# EAGLE board main_schematic (EAGLE 8.7.0)

Size 252.71 x 134.29 mm. Coordinates in mm from the lower left corner, seen from the top.
Outline: 0,0 252.71,0 252.71,134.29 0,134.29 0,0
Copper layers (1*16): Top 0.035mm / dielectric 1.5mm / Bottom 0.035mm
Design rules "default": minimum track width 6mil, minimum drill 0.35mm, track to track 6mil, track to pad 6mil, pad to pad 6mil, via to via 6mil, smd to smd 6mil, copper to edge 40mil, drill to drill 6mil, minimum pad ring 10mil, minimum via ring 8mil, stop-mask expansion 4mil, vias tented up to drill 0mil, thermal gap 10mil

## Footprints (pad centres in the part's own frame; a part is rotated, then mirrored left to right if it is on the bottom)
DUE(NORMAL) = drill 1 long: 2 -16.51,30.48; 3 -19.05,30.48; 3V3 -39.37,-17.78; 4 -21.59,30.48; 5 -24.13,30.48; 5V -36.83,-17.78; 6 -26.67,30.48; 7 -29.21,30.48; 8 -33.02,30.48; 9 -35.56,30.48; 10 -38.1,30.48; 11 -40.64,30.48; 12 -43.18,30.48; 13 -45.72,30.48; A0 -24.13,-17.78; A1 -21.59,-17.78; A2 -19.05,-17.78; A3 -16.51,-17.78; A4 -13.97,-17.78; A5 -11.43,-17.78; A6 -8.89,-17.78; A7 -6.35,-17.78; A8 -1.27,-17.78; A9 1.27,-17.78; A10 3.81,-17.78; A11 6.35,-17.78; AREF -50.8,30.48; AREF1 -50.8,30.48; CANRX 13.97,-17.78; CANTX 16.51,-17.78; DAC0 8.89,-17.78; DAC1 11.43,-17.78; GND1 -48.26,30.48; GND_1 -34.29,-17.78; GND_2 -31.75,-17.78; RESET -41.91,-17.78; RX0 -11.43,30.48; RX1 6.35,30.48; RX2 1.27,30.48; RX3 -3.81,30.48; SCL 11.43,30.48; SDA 8.89,30.48; TX0 -13.97,30.48; TX1 3.81,30.48; TX2 -1.27,30.48; TX3 -6.35,30.48; VIN -29.21,-17.78 | drill 1: 5V_A 19.05,30.48; 5V_B 21.59,30.48; 22 19.05,27.94; 23 21.59,27.94; 24 19.05,25.4; 25 21.59,25.4; 26 19.05,22.86; 27 21.59,22.86; 28 19.05,20.32; 29 21.59,20.32; 30 19.05,17.78; 31 21.59,17.78; 32 19.05,15.24; 33 21.59,15.24; 34 19.05,12.7; 35 21.59,12.7; 36 19.05,10.16; 37 21.59,10.16; 38 19.05,7.62; 39 21.59,7.62; 40 19.05,5.08; 41 21.59,5.08; 42 19.05,2.54; 43 21.59,2.54; 44 19.05,0; 45 21.59,0; 46 19.05,-2.54; 47 21.59,-2.54; 48 19.05,-5.08; 49 21.59,-5.08; 50 19.05,-7.62; 51 21.59,-7.62; 52 19.05,-10.16; 53 21.59,-10.16; GND_A 19.05,-12.7; GND_B 21.59,-12.7 | drill 0.7 pad 1.676: 5V_ICSP -8.89,5.08; GND_ICSP -8.89,10.16; MOSI_ICSP -8.89,7.62; RESET_ICSP -11.43,5.08; SCK_ICSP -11.43,7.62 | drill 0.8 pad 1.422 long: GND_DEBUG -41.91,24.13; IOREF -44.45,-17.78; NC -46.99,-17.78; RESET_DEBUG -49.53,24.13; SCL1 -55.88,30.48; SDA1 -53.34,30.48; SWCLK_DEBUG -44.45,24.13; SWDIO_DEBUG -46.99,24.13 | drill 0.7 pad 1.676 square: MISO_ICSP -11.43,10.16
C0805 = smd 1.3 x 1.5: 1 -0.95,0; 2 0.95,0
PANASONIC_B = smd 2.2 x 1.4: + 1.6,0; - -1.6,0
DLG-0504 = smd 2.5 x 5.08: 1 -2.492,0; 2 2.492,0
R0805 = smd 1.3 x 1.5: 1 -0.95,0; 2 0.95,0
DIL16 = drill 0.813 long: 1 -17.78,8.89; 2 -17.78,6.35; 3 -17.78,3.81; 4 -17.78,1.27; 5 -5.08,1.27; 6 -5.08,3.81; 7 -5.08,6.35; 8 -5.08,8.89; 9 -17.78,-1.27; 10 -17.78,-3.81; 11 -5.08,-3.81; 12 -5.08,-1.27; 13 -17.78,-6.35; 14 -17.78,-8.89; 15 -5.08,-6.35; 16 -5.08,-8.89
JST-XH-04-PACKAGE-LONG-PAD = drill 1.016 long: 1 -3.81,0; 2 -1.27,0; 3 1.27,0; 4 3.81,0
JST-XH-03-PACKAGE-LONG-PAD = drill 1.016 long: 1 -2.54,0; 2 0,0; 3 2.54,0
MA05-2 = drill 1.016 octagon: 1 -5.08,-1.27; 2 -5.08,1.27; 3 -2.54,-1.27; 4 -2.54,1.27; 5 0,-1.27; 6 0,1.27; 7 2.54,-1.27; 8 2.54,1.27; 9 5.08,-1.27; 10 5.08,1.27
JP3Q = drill 0.914 octagon: 1 -2.54,-1.27; 2 -2.54,1.27; 3 0,-1.27; 4 0,1.27; 5 2.54,-1.27; 6 2.54,1.27
1206 = smd 1.6 x 1.803: A -1.422,0; C 1.422,0
SOT23-3 = smd 0.8 x 0.9: 1 -0.95,-1; 2 0.95,-1; 3 0,1.1
SH22 = drill 1.321 pad 2.54 long: 1 -10.998,0; 2 10.998,0
SCREWTERMINAL-5MM-2 = drill 1.3 pad 2.032 square: 1 0,0 | drill 1.3 pad 2.032: 2 5,0
JP1 = drill 0.914 long: 1 0,-1.27; 2 0,1.27
SML0805 = smd 1.2 x 1.2: A 1.05,0; C -1.05,0
TO220AH = drill 1.118 long: B -2.54,-6.35; C 0,-6.35; E 2.54,-6.35 | hole 3.302: 0,11.176
B3F-10XX = drill 1.016 long: 1 -3.251,2.261; 2 3.251,2.261; 3 -3.251,-2.261; 4 3.251,-2.261
JST-XH-02-PACKAGE-LONG-PAD = drill 1.016 long: 1 -1.27,0; 2 1.27,0

## Placement (x,y rotation side)
ARDUINO_DUE:U$1  DUE(NORMAL)  [DUE(NORMAL)]  60.96,66.04 0 top
E1:C9  100nF 50V  [C0805]  -78.74,69.85 0 top  (outside the outline)
E1:C10  100nF 50V  [C0805]  -88.9,69.85 0 top  (outside the outline)
E1:C11  100uF 35V  [PANASONIC_B]  -67.31,69.85 0 top  (outside the outline)
E1:L1  HPI0630-8R2  [DLG-0504]  103.5,36.83 270 top
E1:R17  100k  [R0805]  -97.79,69.85 0 top  (outside the outline)
E1:U$2  POLOLUESTEPPERDRIVER  [DIL16]  140.34,75.56 180 top
E1:X1  MOTOR-OUT  [JST-XH-04-PACKAGE-LONG-PAD]  151.76,60.96 0 top
E2:C9  100nF 50V  [C0805]  -78.74,104.14 0 top  (outside the outline)
E2:C10  100nF 50V  [C0805]  -88.9,104.14 0 top  (outside the outline)
E2:C11  100uF 35V  [PANASONIC_B]  -67.31,104.14 0 top  (outside the outline)
E2:L1  HPI0630-8R2  [DLG-0504]  174.62,90.81 270 top
E2:R17  100k  [R0805]  -97.79,104.14 0 top  (outside the outline)
E2:U$2  POLOLUESTEPPERDRIVER  [DIL16]  156.84,75.56 180 top
E2:X1  MOTOR-OUT  [JST-XH-04-PACKAGE-LONG-PAD]  168.28,60.96 0 top
ENDSTOP_CON:C7  [C0805]  -104.14,349.25 0 top  (outside the outline)
ENDSTOP_CON:C8  [C0805]  -123.19,349.25 0 top  (outside the outline)
ENDSTOP_CON:XMAX  X-MAX  [JST-XH-03-PACKAGE-LONG-PAD]  -17.78,351.79 0 top  (outside the outline)
ENDSTOP_CON:XMIN  X-MIN  [JST-XH-03-PACKAGE-LONG-PAD]  -55.88,351.79 0 top  (outside the outline)
ENDSTOP_CON:YMAX  Y-MAX  [JST-XH-03-PACKAGE-LONG-PAD]  -30.48,351.79 0 top  (outside the outline)
ENDSTOP_CON:YMIN  Y-MIN  [JST-XH-03-PACKAGE-LONG-PAD]  -68.58,351.79 0 top  (outside the outline)
ENDSTOP_CON:ZMAX  Z-MAX  [JST-XH-03-PACKAGE-LONG-PAD]  -43.18,351.79 0 top  (outside the outline)
ENDSTOP_CON:ZMIN  Z-MIN  [JST-XH-03-PACKAGE-LONG-PAD]  -81.28,351.79 0 top  (outside the outline)
EXP1:EXP1  [MA05-2]  -139.7,396.24 0 top  (outside the outline)
EXP2:EXP2  [MA05-2]  -154.94,396.24 0 top  (outside the outline)
FAN1:JP2  FAN1_Vcc  [JP3Q]  -85.09,384.81 0 top  (outside the outline)
FAN1:LED1  [1206]  -135.89,379.73 0 top  (outside the outline)
FAN1:Q1  IRLML0030TRPBF  [SOT23-3]  -123.19,381 0 top  (outside the outline)
FAN1:R7  2K7  [R0805]  -96.52,382.27 0 top  (outside the outline)
FAN1:R8  100R  [R0805]  -106.68,382.27 0 top  (outside the outline)
FAN1:R9  10K  [R0805]  -116.84,382.27 0 top  (outside the outline)
FAN2:JP2  FAN1_Vcc  [JP3Q]  -19.05,397.51 0 top  (outside the outline)
FAN2:LED1  [1206]  -69.85,392.43 0 top  (outside the outline)
FAN2:Q1  IRLML0030TRPBF  [SOT23-3]  -57.15,393.7 0 top  (outside the outline)
FAN2:R7  2K7  [R0805]  -30.48,394.97 0 top  (outside the outline)
FAN2:R8  100R  [R0805]  -40.64,394.97 0 top  (outside the outline)
FAN2:R9  10K  [R0805]  -50.8,394.97 0 top  (outside the outline)
FAN3:JP2  FAN1_Vcc  [JP3Q]  -78.74,397.51 0 top  (outside the outline)
FAN3:LED1  [1206]  -129.54,392.43 0 top  (outside the outline)
FAN3:Q1  IRLML0030TRPBF  [SOT23-3]  -116.84,393.7 0 top  (outside the outline)
FAN3:R7  2K7  [R0805]  -90.17,394.97 0 top  (outside the outline)
FAN3:R8  100R  [R0805]  -100.33,394.97 0 top  (outside the outline)
FAN3:R9  10K  [R0805]  -110.49,394.97 0 top  (outside the outline)
FAN_CON1:FAN1  FAN1  [JST-XH-03-PACKAGE-LONG-PAD]  -130.81,351.79 0 top  (outside the outline)
FAN_CON1:FAN2  FAN2  [JST-XH-03-PACKAGE-LONG-PAD]  -143.51,351.79 0 top  (outside the outline)
FAN_CON1:FAN3  FAN3  [JST-XH-03-PACKAGE-LONG-PAD]  -156.21,351.79 0 top  (outside the outline)
HC-POWER-SUPPLY-HEATBED:F1  [SH22]  -41.91,373.38 0 top  (outside the outline)
HC-POWER-SUPPLY-HEATBED:J2  [SCREWTERMINAL-5MM-2]  -68.58,369.57 0 top  (outside the outline)
HC-POWER-SUPPLY-HOTEND:F1  [SH22]  -100.33,373.38 0 top  (outside the outline)
HC-POWER-SUPPLY-HOTEND:J2  [SCREWTERMINAL-5MM-2]  -127,369.57 0 top  (outside the outline)
HC-POWER-SUPPLY:F1  [SH22]  -29.21,386.08 0 top  (outside the outline)
HC-POWER-SUPPLY:J2  [SCREWTERMINAL-5MM-2]  -52.07,382.27 0 top  (outside the outline)
HEATBED:JP1  [JP1]  -34.29,275.59 0 top  (outside the outline)
HEATBED:LED1  [SML0805]  -92.71,273.05 0 top  (outside the outline)
HEATBED:Q1  IRLRB8743  [TO220AH]  -26.67,280.67 0 top  (outside the outline)
HEATBED:R1  470R  [R0805]  -49.53,275.59 0 top  (outside the outline)
HEATBED:R2  100R  [R0805]  -63.5,275.59 0 top  (outside the outline)
HEATBED:R3  10K  [R0805]  -77.47,275.59 0 top  (outside the outline)
HOTEND1:JP1  [JP1]  -34.29,300.99 0 top  (outside the outline)
HOTEND1:LED1  [SML0805]  -92.71,298.45 0 top  (outside the outline)
HOTEND1:Q1  IRLRB8743  [TO220AH]  -26.67,306.07 0 top  (outside the outline)
HOTEND1:R1  470R  [R0805]  -49.53,300.99 0 top  (outside the outline)
HOTEND1:R2  100R  [R0805]  -63.5,300.99 0 top  (outside the outline)
HOTEND1:R3  10K  [R0805]  -77.47,300.99 0 top  (outside the outline)
HOTEND2:JP1  [JP1]  -34.29,326.39 0 top  (outside the outline)
HOTEND2:LED1  [SML0805]  -92.71,323.85 0 top  (outside the outline)
HOTEND2:Q1  IRLRB8743  [TO220AH]  -26.67,331.47 0 top  (outside the outline)
HOTEND2:R1  470R  [R0805]  -49.53,326.39 0 top  (outside the outline)
HOTEND2:R2  100R  [R0805]  -63.5,326.39 0 top  (outside the outline)
HOTEND2:R3  10K  [R0805]  -77.47,326.39 0 top  (outside the outline)
RESET:S1  RESET  [B3F-10XX]  -62.23,384.81 0 top  (outside the outline)
RESET:X1  RESET  [JST-XH-02-PACKAGE-LONG-PAD]  -72.39,382.27 0 top  (outside the outline)
TERM1:C1  10uF  [C0805]  -54.61,406.4 0 top  (outside the outline)
TERM1:R1  100R  [R0805]  -33.02,406.4 0 top  (outside the outline)
TERM1:R2  4K7  [R0805]  -44.45,406.4 0 top  (outside the outline)
TERM1:X1  TERM  [JST-XH-02-PACKAGE-LONG-PAD]  -17.78,406.4 0 top  (outside the outline)
TERM2:C1  10uF  [C0805]  -99.06,406.4 0 top  (outside the outline)
TERM2:R1  100R  [R0805]  -77.47,406.4 0 top  (outside the outline)
TERM2:R2  4K7  [R0805]  -88.9,406.4 0 top  (outside the outline)
TERM2:X1  TERM  [JST-XH-02-PACKAGE-LONG-PAD]  -62.23,406.4 0 top  (outside the outline)
TERM3:C1  10uF  [C0805]  -143.51,406.4 0 top  (outside the outline)
TERM3:R1  100R  [R0805]  -121.92,406.4 0 top  (outside the outline)
TERM3:R2  4K7  [R0805]  -133.35,406.4 0 top  (outside the outline)
TERM3:X1  TERM  [JST-XH-02-PACKAGE-LONG-PAD]  -106.68,406.4 0 top  (outside the outline)
TERM4:C1  10uF  [C0805]  -54.61,416.56 0 top  (outside the outline)
TERM4:R1  100R  [R0805]  -33.02,416.56 0 top  (outside the outline)
TERM4:R2  4K7  [R0805]  -44.45,416.56 0 top  (outside the outline)
TERM4:X1  TERM  [JST-XH-02-PACKAGE-LONG-PAD]  -17.78,416.56 0 top  (outside the outline)
X-MAX:C6  100nF  [C0805]  -76.2,416.56 0 top  (outside the outline)
X-MAX:R6  10K  [R0805]  -66.04,416.56 0 top  (outside the outline)
X-MIN:C6  100nF  [C0805]  -97.79,416.56 0 top  (outside the outline)
X-MIN:R6  10K  [R0805]  -87.63,416.56 0 top  (outside the outline)
X:C9  100nF 50V  [C0805]  184.78,88.27 180 top
X:C10  100nF 50V  [C0805]  184.78,90.17 180 top
X:C11  100uF 35V  [PANASONIC_B]  184.78,93.98 0 top
X:L1  HPI0630-8R2  [DLG-0504]  190.5,90.81 270 top
X:R17  100k  [R0805]  181.61,77.47 270 top
X:U$2  POLOLUESTEPPERDRIVER  [DIL16]  172.72,75.56 180 top
X:X1  MOTOR-OUT  [JST-XH-04-PACKAGE-LONG-PAD]  184.15,60.96 0 top
Y-MAX:C6  100nF  [C0805]  -119.38,416.56 0 top  (outside the outline)
Y-MAX:R6  10K  [R0805]  -109.22,416.56 0 top  (outside the outline)
Y-MIN:C6  100nF  [C0805]  -30.48,426.72 0 top  (outside the outline)
Y-MIN:R6  10K  [R0805]  -20.32,426.72 0 top  (outside the outline)
Y:C9  100nF 50V  [C0805]  200.66,88.27 180 top
Y:C10  100nF 50V  [C0805]  200.66,90.17 180 top
Y:C11  100uF 35V  [PANASONIC_B]  200.66,93.98 0 top
Y:L1  HPI0630-8R2  [DLG-0504]  206.38,90.81 270 top
Y:R17  100k  [R0805]  197.49,77.47 270 top
Y:U$2  POLOLUESTEPPERDRIVER  [DIL16]  188.59,75.56 180 top
Y:X1  MOTOR-OUT  [JST-XH-04-PACKAGE-LONG-PAD]  200.03,60.96 0 top
Z1:C9  100nF 50V  [C0805]  -78.74,138.43 0 top  (outside the outline)
Z1:C10  100nF 50V  [C0805]  -88.9,138.43 0 top  (outside the outline)
Z1:C11  100uF 35V  [PANASONIC_B]  -67.31,138.43 0 top  (outside the outline)
Z1:L1  HPI0630-8R2  [DLG-0504]  63.5,36.83 270 top
Z1:R17  100k  [R0805]  -97.79,138.43 0 top  (outside the outline)
Z1:U$2  POLOLUESTEPPERDRIVER  [DIL16]  107.31,75.56 180 top
Z1:X1  MOTOR-OUT  [JST-XH-04-PACKAGE-LONG-PAD]  118.75,60.96 0 top
Z2:C9  100nF 50V  [C0805]  -78.74,172.72 0 top  (outside the outline)
Z2:C10  100nF 50V  [C0805]  -88.9,172.72 0 top  (outside the outline)
Z2:C11  100uF 35V  [PANASONIC_B]  -67.31,172.72 0 top  (outside the outline)
Z2:L1  HPI0630-8R2  [DLG-0504]  -41.91,175.26 0 top  (outside the outline)
Z2:R17  100k  [R0805]  -97.79,172.72 0 top  (outside the outline)
Z2:U$2  POLOLUESTEPPERDRIVER  [DIL16]  123.83,75.56 180 top
Z2:X1  MOTOR-OUT  [JST-XH-04-PACKAGE-LONG-PAD]  135.25,60.96 0 top
Z-MAX:C6  100nF  [C0805]  -140.97,416.56 0 top  (outside the outline)
Z-MAX:R6  10K  [R0805]  -130.81,416.56 0 top  (outside the outline)
Z-MIN:C6  100nF  [C0805]  -162.56,416.56 0 top  (outside the outline)
Z-MIN:R6  10K  [R0805]  -152.4,416.56 0 top  (outside the outline)

## Library data of the parts
ARDUINO_DUE:U$1 = DUElib130425
E1:C9-E1:C11 E1:R17 E2:C9-E2:C11 E2:R17 ENDSTOP_CON:C7 ENDSTOP_CON:C8 FAN1:R7-FAN1:R9 FAN2:R7-FAN2:R9 FAN3:R7-FAN3:R9 HEATBED:R1-HEATBED:R3 HOTEND1:R1-HOTEND1:R3 HOTEND2:R1-HOTEND2:R3 TERM1:C1 TERM1:R1 TERM1:R2 TERM2:C1 TERM2:R1 TERM2:R2 TERM3:C1 TERM3:R1 TERM3:R2 TERM4:C1 TERM4:R1 TERM4:R2 X-MAX:C6 X-MAX:R6 X-MIN:C6 X-MIN:R6 X:C9-X:C11 X:R17 Y-MAX:C6 Y-MAX:R6 Y-MIN:C6 Y-MIN:R6 Y:C9-Y:C11 Y:R17 Z1:C9-Z1:C11 Z1:R17 Z2:C9-Z2:C11 Z2:R17 Z-MAX:C6 Z-MAX:R6 Z-MIN:C6 Z-MIN:R6 = resistor
E1:L1 E2:L1 X:L1 Y:L1 Z1:L1 Z2:L1 = DLG-0504
E1:U$2 E2:U$2 X:U$2 Y:U$2 Z1:U$2 Z2:U$2 = reprap
E1:X1 E2:X1 ENDSTOP_CON:XMAX ENDSTOP_CON:XMIN ENDSTOP_CON:YMAX ENDSTOP_CON:YMIN ENDSTOP_CON:ZMAX ENDSTOP_CON:ZMIN FAN_CON1:FAN1-FAN_CON1:FAN3 RESET:X1 TERM1:X1 TERM2:X1 TERM3:X1 TERM4:X1 X:X1 Y:X1 Z1:X1 Z2:X1 = Rembrandt Electronics - JST XH Connectors v1-0
EXP1:EXP1 EXP2:EXP2 = con-lstb; OC_FARNELL: unknown; OC_NEWARK: unknown
FAN1:JP2 FAN2:JP2 FAN3:JP2 HEATBED:JP1 HOTEND1:JP1 HOTEND2:JP1 = jumper
FAN1:LED1 FAN2:LED1 FAN3:LED1 HEATBED:LED1 HOTEND1:LED1 HOTEND2:LED1 = led
FAN1:Q1 FAN2:Q1 FAN3:Q1 = fets
HC-POWER-SUPPLY-HEATBED:F1 HC-POWER-SUPPLY-HOTEND:F1 HC-POWER-SUPPLY:F1 = fuse; OC_FARNELL: unknown; OC_NEWARK: unknown
HC-POWER-SUPPLY-HEATBED:J2 HC-POWER-SUPPLY-HOTEND:J2 HC-POWER-SUPPLY:J2 = SparkFun-Connectors; SF_SKU: PRT-08432
HEATBED:Q1 HOTEND1:Q1 HOTEND2:Q1 = transistor-power
RESET:S1 = switch-omron; MPN: B3F-1000; OC_FARNELL: 176432; OC_NEWARK: 36M3542

## Nets
+3V3: ARDUINO_DUE:U$1.3V3 ARDUINO_DUE:U$1.IOREF E1:R17.2 E1:U$2.7 E2:R17.2 E2:U$2.7 TERM1:R2.2 TERM2:R2.2 TERM3:R2.2 TERM4:R2.2 X:R17.2 X:U$2.7 Y:R17.2 Y:U$2.7 Z1:R17.2 Z1:U$2.7 Z2:R17.2 Z2:U$2.7
+5V: ARDUINO_DUE:U$1.5V ARDUINO_DUE:U$1.GND_ICSP ENDSTOP_CON:C7.1 ENDSTOP_CON:C8.1 ENDSTOP_CON:XMAX.2 ENDSTOP_CON:XMIN.2 ENDSTOP_CON:YMAX.2 ENDSTOP_CON:YMIN.2 ENDSTOP_CON:ZMAX.2 ENDSTOP_CON:ZMIN.2 EXP2:EXP2.9 FAN1:JP2.5 FAN2:JP2.5 FAN3:JP2.5
+12V: ARDUINO_DUE:U$1.VIN FAN1:JP2.3 FAN2:JP2.3 FAN3:JP2.3
+24V: E1:C10.1 E1:C11.+ E1:L1.1 E2:C10.1 E2:C11.+ E2:L1.1 FAN1:JP2.1 FAN2:JP2.1 FAN3:JP2.1 HC-POWER-SUPPLY:F1.2 X:C10.1 X:C11.+ X:L1.1 Y:C10.1 Y:C11.+ Y:L1.1 Z1:C10.1 Z1:C11.+ Z1:L1.1 Z2:C10.1 Z2:C11.+ Z2:L1.1
ARDUINO_DUE:25: ARDUINO_DUE:U$1.25
ARDUINO_DUE:27: ARDUINO_DUE:U$1.27
ARDUINO_DUE:29: ARDUINO_DUE:U$1.29
ARDUINO_DUE:31: ARDUINO_DUE:U$1.31
ARDUINO_DUE:33: ARDUINO_DUE:U$1.33
ARDUINO_DUE:35: ARDUINO_DUE:U$1.35
ARDUINO_DUE:37: ARDUINO_DUE:U$1.37
ARDUINO_DUE:CANRX: ARDUINO_DUE:U$1.CANRX
ARDUINO_DUE:CANTX: ARDUINO_DUE:U$1.CANTX
ARDUINO_DUE:CS0: ARDUINO_DUE:U$1.10
ARDUINO_DUE:DAC0: ARDUINO_DUE:U$1.DAC0
ARDUINO_DUE:DAC1: ARDUINO_DUE:U$1.DAC1
ARDUINO_DUE:PSON: ARDUINO_DUE:U$1.40
ARDUINO_DUE:PWM1: ARDUINO_DUE:U$1.5
ARDUINO_DUE:PWM2: ARDUINO_DUE:U$1.6
ARDUINO_DUE:PWM3: ARDUINO_DUE:U$1.13
ARDUINO_DUE:RX0: ARDUINO_DUE:U$1.RX0
ARDUINO_DUE:RX1: ARDUINO_DUE:U$1.RX1
ARDUINO_DUE:SCL: ARDUINO_DUE:U$1.SCL
ARDUINO_DUE:SCL1: ARDUINO_DUE:U$1.SCL1
ARDUINO_DUE:SDA: ARDUINO_DUE:U$1.SDA
ARDUINO_DUE:SDA1: ARDUINO_DUE:U$1.SDA1
ARDUINO_DUE:TC-K1: ARDUINO_DUE:U$1.A4
ARDUINO_DUE:TC-K2: ARDUINO_DUE:U$1.A3
ARDUINO_DUE:TX0: ARDUINO_DUE:U$1.TX0
ARDUINO_DUE:TX1: ARDUINO_DUE:U$1.TX1
E1:N$7: E1:U$2.3 E1:X1.4
E1:N$8: E1:U$2.4 E1:X1.3
E1:N$9: E1:U$2.5 E1:X1.2
E1:N$10: E1:U$2.6 E1:X1.1
E1:N$25: E1:C9.1 E1:L1.2 E1:U$2.1
E2:N$7: E2:U$2.3 E2:X1.4
E2:N$8: E2:U$2.4 E2:X1.3
E2:N$9: E2:U$2.5 E2:X1.2
E2:N$10: E2:U$2.6 E2:X1.1
E2:N$25: E2:C9.1 E2:L1.2 E2:U$2.1
FAN1:N$2: FAN1:LED1.A FAN1:R7.2
FAN1:N$5: FAN1:Q1.1 FAN1:R8.2 FAN1:R9.1
FAN2:N$2: FAN2:LED1.A FAN2:R7.2
FAN2:N$5: FAN2:Q1.1 FAN2:R8.2 FAN2:R9.1
FAN3:N$2: FAN3:LED1.A FAN3:R7.2
FAN3:N$5: FAN3:Q1.1 FAN3:R8.2 FAN3:R9.1
FAN_CON1:FAN1-OUT: FAN_CON1:FAN1.1
FAN_CON1:FAN2-OUT: FAN_CON1:FAN2.1
FAN_CON1:FAN3-OUT: FAN_CON1:FAN3.1
GND: ARDUINO_DUE:U$1.5V_ICSP ARDUINO_DUE:U$1.GND_1 ARDUINO_DUE:U$1.GND_2 E1:C9.2 E1:C10.2 E1:C11.- E1:U$2.2 E1:U$2.8 E2:C9.2 E2:C10.2 E2:C11.- E2:U$2.2 E2:U$2.8 ENDSTOP_CON:C7.2 ENDSTOP_CON:C8.2 ENDSTOP_CON:XMAX.1 ENDSTOP_CON:XMIN.1 ENDSTOP_CON:YMAX.1 ENDSTOP_CON:YMIN.1 ENDSTOP_CON:ZMAX.1 ENDSTOP_CON:ZMIN.1 EXP1:EXP1.10 EXP2:EXP2.10 FAN1:Q1.2 FAN1:R9.2 FAN2:Q1.2 FAN2:R9.2 FAN3:Q1.2 FAN3:R9.2 HC-POWER-SUPPLY:J2.1 HEATBED:LED1.C HOTEND1:LED1.C HOTEND2:LED1.C RESET:S1.2 RESET:X1.1 TERM1:C1.1 TERM1:X1.2 TERM2:C1.1 TERM2:X1.2 TERM3:C1.1 TERM3:X1.2 TERM4:C1.1 TERM4:X1.2 X-MAX:C6.2 X-MIN:C6.2 X:C9.2 X:C10.2 X:C11.- X:U$2.2 X:U$2.8 Y-MAX:C6.2 Y-MIN:C6.2 Y:C9.2 Y:C10.2 Y:C11.- Y:U$2.2 Y:U$2.8 Z1:C9.2 Z1:C10.2 Z1:C11.- Z1:U$2.2 Z1:U$2.8 Z2:C9.2 Z2:C10.2 Z2:C11.- Z2:U$2.2 Z2:U$2.8 Z-MAX:C6.2 Z-MIN:C6.2
HC-POWER-SUPPLY-HEATBED:N$1: HC-POWER-SUPPLY-HEATBED:F1.1 HC-POWER-SUPPLY-HEATBED:J2.2
HC-POWER-SUPPLY-HOTEND:N$1: HC-POWER-SUPPLY-HOTEND:F1.1 HC-POWER-SUPPLY-HOTEND:J2.2
HC-POWER-SUPPLY:N$1: HC-POWER-SUPPLY:F1.1 HC-POWER-SUPPLY:J2.2
HEATBED:N$1: HEATBED:JP1.1 HEATBED:R1.2 HEATBED:R2.2
HEATBED:N$2: HEATBED:LED1.A HEATBED:R1.1
HEATBED:N$3: HEATBED:Q1.B HEATBED:R2.1 HEATBED:R3.2
HOTEND1:N$1: HOTEND1:JP1.1 HOTEND1:R1.2 HOTEND1:R2.2
HOTEND1:N$2: HOTEND1:LED1.A HOTEND1:R1.1
HOTEND1:N$3: HOTEND1:Q1.B HOTEND1:R2.1 HOTEND1:R3.2
HOTEND2:N$1: HOTEND2:JP1.1 HOTEND2:R1.2 HOTEND2:R2.2
HOTEND2:N$2: HOTEND2:LED1.A HOTEND2:R1.1
HOTEND2:N$3: HOTEND2:Q1.B HOTEND2:R2.1 HOTEND2:R3.2
N$1: ARDUINO_DUE:U$1.MISO_ICSP E1:U$2.12 E2:U$2.12 EXP1:EXP1.2 X:U$2.12 Y:U$2.12 Z1:U$2.12 Z2:U$2.12
N$2: ARDUINO_DUE:U$1.MOSI_ICSP E1:U$2.15 E2:U$2.15 EXP1:EXP1.5 X:U$2.15 Y:U$2.15 Z1:U$2.15 Z2:U$2.15
N$3: ARDUINO_DUE:U$1.SCK_ICSP E1:U$2.14 E2:U$2.14 EXP1:EXP1.1 X:U$2.14 Y:U$2.14 Z1:U$2.14 Z2:U$2.14
N$4: ARDUINO_DUE:U$1.RESET_ICSP EXP1:EXP1.7 RESET:S1.4 RESET:X1.2
N$5: ARDUINO_DUE:U$1.50 EXP1:EXP1.6
N$6: ARDUINO_DUE:U$1.52 EXP1:EXP1.4
N$7: ARDUINO_DUE:U$1.4 EXP1:EXP1.3
N$8: ARDUINO_DUE:U$1.TX3 EXP1:EXP1.8
N$9: ARDUINO_DUE:U$1.41 EXP2:EXP2.2
N$10: ARDUINO_DUE:U$1.48 EXP2:EXP2.1
N$11: ARDUINO_DUE:U$1.38 X-MIN:C6.1 X-MIN:R6.2
N$12: ARDUINO_DUE:U$1.44 EXP2:EXP2.6
N$13: ARDUINO_DUE:U$1.45 EXP2:EXP2.5
N$14: ARDUINO_DUE:U$1.46 EXP2:EXP2.8
N$15: ARDUINO_DUE:U$1.47 EXP2:EXP2.7
N$16: ARDUINO_DUE:U$1.43 EXP2:EXP2.4
N$17: ARDUINO_DUE:U$1.42 EXP2:EXP2.3
N$18: ARDUINO_DUE:U$1.22 X:R17.1 X:U$2.16
N$19: ARDUINO_DUE:U$1.2 X:U$2.10
N$20: ARDUINO_DUE:U$1.3 X:U$2.9
N$21: ARDUINO_DUE:U$1.26 Y:R17.1 Y:U$2.16
N$22: ARDUINO_DUE:U$1.RX2 Y:U$2.10
N$23: ARDUINO_DUE:U$1.TX2 Y:U$2.9
N$24: ARDUINO_DUE:U$1.36 X-MAX:C6.1 X-MAX:R6.2
N$25: ARDUINO_DUE:U$1.RX3 Z1:R17.1 Z1:U$2.16
N$26: ARDUINO_DUE:U$1.34 Y-MIN:C6.1 Y-MIN:R6.2
N$27: ARDUINO_DUE:U$1.32 Y-MAX:C6.1 Y-MAX:R6.2
N$28: ARDUINO_DUE:U$1.30 Z-MIN:C6.1 Z-MIN:R6.2
N$29: ARDUINO_DUE:U$1.28 Z-MAX:C6.1 Z-MAX:R6.2
N$30: ENDSTOP_CON:XMAX.3 X-MIN:R6.1
N$31: ENDSTOP_CON:XMIN.3 X-MAX:R6.1
N$32: ENDSTOP_CON:YMAX.3 Y-MIN:R6.1
N$33: ENDSTOP_CON:YMIN.3 Y-MAX:R6.1
N$34: ENDSTOP_CON:ZMAX.3 Z-MIN:R6.1
N$35: ENDSTOP_CON:ZMIN.3 Z-MAX:R6.1
N$36: FAN1:JP2.2 FAN1:JP2.4 FAN1:JP2.6 FAN1:R7.1 FAN_CON1:FAN1.2
N$37: FAN1:LED1.C FAN1:Q1.3 FAN_CON1:FAN1.3
N$38: FAN2:JP2.2 FAN2:JP2.4 FAN2:JP2.6 FAN2:R7.1 FAN_CON1:FAN2.2
N$39: FAN2:LED1.C FAN2:Q1.3 FAN_CON1:FAN2.3
N$40: FAN3:JP2.2 FAN3:JP2.4 FAN3:JP2.6 FAN3:R7.1 FAN_CON1:FAN3.2
N$41: FAN3:LED1.C FAN3:Q1.3 FAN_CON1:FAN3.3
N$42: ARDUINO_DUE:U$1.A7 Z1:U$2.10
N$43: ARDUINO_DUE:U$1.A6 Z1:U$2.9
N$44: ARDUINO_DUE:U$1.A8 Z2:R17.1 Z2:U$2.16
N$45: ARDUINO_DUE:U$1.A10 Z2:U$2.10
N$46: ARDUINO_DUE:U$1.A9 Z2:U$2.9
N$47: ARDUINO_DUE:U$1.A11 E1:R17.1 E1:U$2.16
N$48: ARDUINO_DUE:U$1.11 FAN1:R8.1
N$49: ARDUINO_DUE:U$1.9 FAN2:R8.1
N$50: ARDUINO_DUE:U$1.12 FAN3:R8.1
N$51: ARDUINO_DUE:U$1.51 E1:U$2.10
N$52: ARDUINO_DUE:U$1.53 E1:U$2.9
N$53: ARDUINO_DUE:U$1.49 E2:R17.1 E2:U$2.16
N$54: ARDUINO_DUE:U$1.24 E2:U$2.10
N$55: ARDUINO_DUE:U$1.23 E2:U$2.9
N$56: X:U$2.13
N$57: Y:U$2.13
N$58: Z1:U$2.13
N$59: Z2:U$2.13
N$60: E1:U$2.13
N$61: E2:U$2.13
N$62: HC-POWER-SUPPLY-HOTEND:J2.1 HOTEND1:Q1.E HOTEND1:R3.1 HOTEND2:Q1.E HOTEND2:R3.1
N$63: HC-POWER-SUPPLY-HOTEND:F1.2 HOTEND1:Q1.C HOTEND2:Q1.C
N$64: ARDUINO_DUE:U$1.7 HOTEND2:JP1.2
N$65: ARDUINO_DUE:U$1.8 HOTEND1:JP1.2
N$66: HC-POWER-SUPPLY-HEATBED:J2.1 HEATBED:Q1.E HEATBED:R3.1
N$67: HC-POWER-SUPPLY-HEATBED:F1.2 HEATBED:Q1.C
N$68: ARDUINO_DUE:U$1.39 HEATBED:JP1.2
N$69: ARDUINO_DUE:U$1.A5 TERM4:R1.1
N$70: ARDUINO_DUE:U$1.A2 TERM3:R1.1
N$71: ARDUINO_DUE:U$1.A1 TERM2:R1.1
N$72: ARDUINO_DUE:U$1.A0 TERM1:R1.1
TERM1:N$1: TERM1:C1.2 TERM1:R1.2 TERM1:R2.1 TERM1:X1.1
TERM2:N$1: TERM2:C1.2 TERM2:R1.2 TERM2:R2.1 TERM2:X1.1
TERM3:N$1: TERM3:C1.2 TERM3:R1.2 TERM3:R2.1 TERM3:X1.1
TERM4:N$1: TERM4:C1.2 TERM4:R1.2 TERM4:R2.1 TERM4:X1.1
X:N$7: X:U$2.3 X:X1.4
X:N$8: X:U$2.4 X:X1.3
X:N$9: X:U$2.5 X:X1.2
X:N$10: X:U$2.6 X:X1.1
X:N$25: X:C9.1 X:L1.2 X:U$2.1
Y:N$7: Y:U$2.3 Y:X1.4
Y:N$8: Y:U$2.4 Y:X1.3
Y:N$9: Y:U$2.5 Y:X1.2
Y:N$10: Y:U$2.6 Y:X1.1
Y:N$25: Y:C9.1 Y:L1.2 Y:U$2.1
Z1:N$7: Z1:U$2.3 Z1:X1.4
Z1:N$8: Z1:U$2.4 Z1:X1.3
Z1:N$9: Z1:U$2.5 Z1:X1.2
Z1:N$10: Z1:U$2.6 Z1:X1.1
Z1:N$25: Z1:C9.1 Z1:L1.2 Z1:U$2.1
Z2:N$7: Z2:U$2.3 Z2:X1.4
Z2:N$8: Z2:U$2.4 Z2:X1.3
Z2:N$9: Z2:U$2.5 Z2:X1.2
Z2:N$10: Z2:U$2.6 Z2:X1.1
Z2:N$25: Z2:C9.1 Z2:L1.2 Z2:U$2.1

## Tracks (layer width: path | path; a pad name or v marks a point on that pad's centre or on a via)
+3V3  (17 unrouted)
+5V  (13 unrouted)
+12V  (3 unrouted)
+24V  (21 unrouted)
E1:N$7  (1 unrouted)
E1:N$8  (1 unrouted)
E1:N$9  (1 unrouted)
E1:N$10  (1 unrouted)
E1:N$25  (2 unrouted)
E2:N$7  (1 unrouted)
E2:N$8  (1 unrouted)
E2:N$9  (1 unrouted)
E2:N$10  (1 unrouted)
E2:N$25  (2 unrouted)
FAN1:N$2  (1 unrouted)
FAN1:N$5  (2 unrouted)
FAN2:N$2  (1 unrouted)
FAN2:N$5  (2 unrouted)
FAN3:N$2  (1 unrouted)
FAN3:N$5  (2 unrouted)
GND  (68 unrouted)
HC-POWER-SUPPLY-HEATBED:N$1  (1 unrouted)
HC-POWER-SUPPLY-HOTEND:N$1  (1 unrouted)
HC-POWER-SUPPLY:N$1  (1 unrouted)
HEATBED:N$1  (2 unrouted)
HEATBED:N$2  (1 unrouted)
HEATBED:N$3  (2 unrouted)
HOTEND1:N$1  (2 unrouted)
HOTEND1:N$2  (1 unrouted)
HOTEND1:N$3  (2 unrouted)
HOTEND2:N$1  (2 unrouted)
HOTEND2:N$2  (1 unrouted)
HOTEND2:N$3  (2 unrouted)
N$1  (7 unrouted)
N$2  (7 unrouted)
N$3  (7 unrouted)
N$4  (3 unrouted)
N$5  (1 unrouted)
N$6  (1 unrouted)
N$7  (1 unrouted)
N$8  (1 unrouted)
N$9  (1 unrouted)
N$10  (1 unrouted)
N$11  (2 unrouted)
N$12  (1 unrouted)
N$13  (1 unrouted)
N$14  (1 unrouted)
N$15  (1 unrouted)
N$16  (1 unrouted)
N$17  (1 unrouted)
N$18  (2 unrouted)
N$19  (1 unrouted)
N$20  (1 unrouted)
N$21  (2 unrouted)
N$22  (1 unrouted)
N$23  (1 unrouted)
N$24  (2 unrouted)
N$25  (2 unrouted)
N$26  (2 unrouted)
N$27  (2 unrouted)
N$28  (2 unrouted)
N$29  (2 unrouted)
N$30  (1 unrouted)
N$31  (1 unrouted)
N$32  (1 unrouted)
N$33  (1 unrouted)
N$34  (1 unrouted)
N$35  (1 unrouted)
N$36  (4 unrouted)
N$37  (2 unrouted)
N$38  (4 unrouted)
N$39  (2 unrouted)
N$40  (4 unrouted)
N$41  (2 unrouted)
N$42  (1 unrouted)
N$43  (1 unrouted)
N$44  (2 unrouted)
N$45  (1 unrouted)
N$46  (1 unrouted)
N$47  (2 unrouted)
N$48  (1 unrouted)
N$49  (1 unrouted)
N$50  (1 unrouted)
N$51  (1 unrouted)
N$52  (1 unrouted)
N$53  (2 unrouted)
N$54  (1 unrouted)
N$55  (1 unrouted)
N$62  (4 unrouted)
N$63  (2 unrouted)
N$64  (1 unrouted)
N$65  (1 unrouted)
N$66  (2 unrouted)
N$67  (1 unrouted)
N$68  (1 unrouted)
N$69  (1 unrouted)
N$70  (1 unrouted)
N$71  (1 unrouted)
N$72  (1 unrouted)
TERM1:N$1  (3 unrouted)
TERM2:N$1  (3 unrouted)
TERM3:N$1  (3 unrouted)
TERM4:N$1  (3 unrouted)
X:N$7  (1 unrouted)
X:N$8  (1 unrouted)
X:N$9  (1 unrouted)
X:N$10  (1 unrouted)
X:N$25  (2 unrouted)
Y:N$7  (1 unrouted)
Y:N$8  (1 unrouted)
Y:N$9  (1 unrouted)
Y:N$10  (1 unrouted)
Y:N$25  (2 unrouted)
Z1:N$7  (1 unrouted)
Z1:N$8  (1 unrouted)
Z1:N$9  (1 unrouted)
Z1:N$10  (1 unrouted)
Z1:N$25  (2 unrouted)
Z2:N$7  (1 unrouted)
Z2:N$8  (1 unrouted)
Z2:N$9  (1 unrouted)
Z2:N$10  (1 unrouted)
Z2:N$25  (2 unrouted)